# Altium PCB PLL_PCB.PcbDoc (part 2 of 3)
Units mil, origin at the board's own origin, x right, y up, seen from the top; angles counter-clockwise.
Board outline 8251 x 7030 mil, 4 copper layers (Top Layer, Mid-Layer 1, Mid-Layer 2, Bottom Layer); 235 components, 120 nets, 656 pads, 49 vias.
Unrouted connection lines stored in the file: 215.
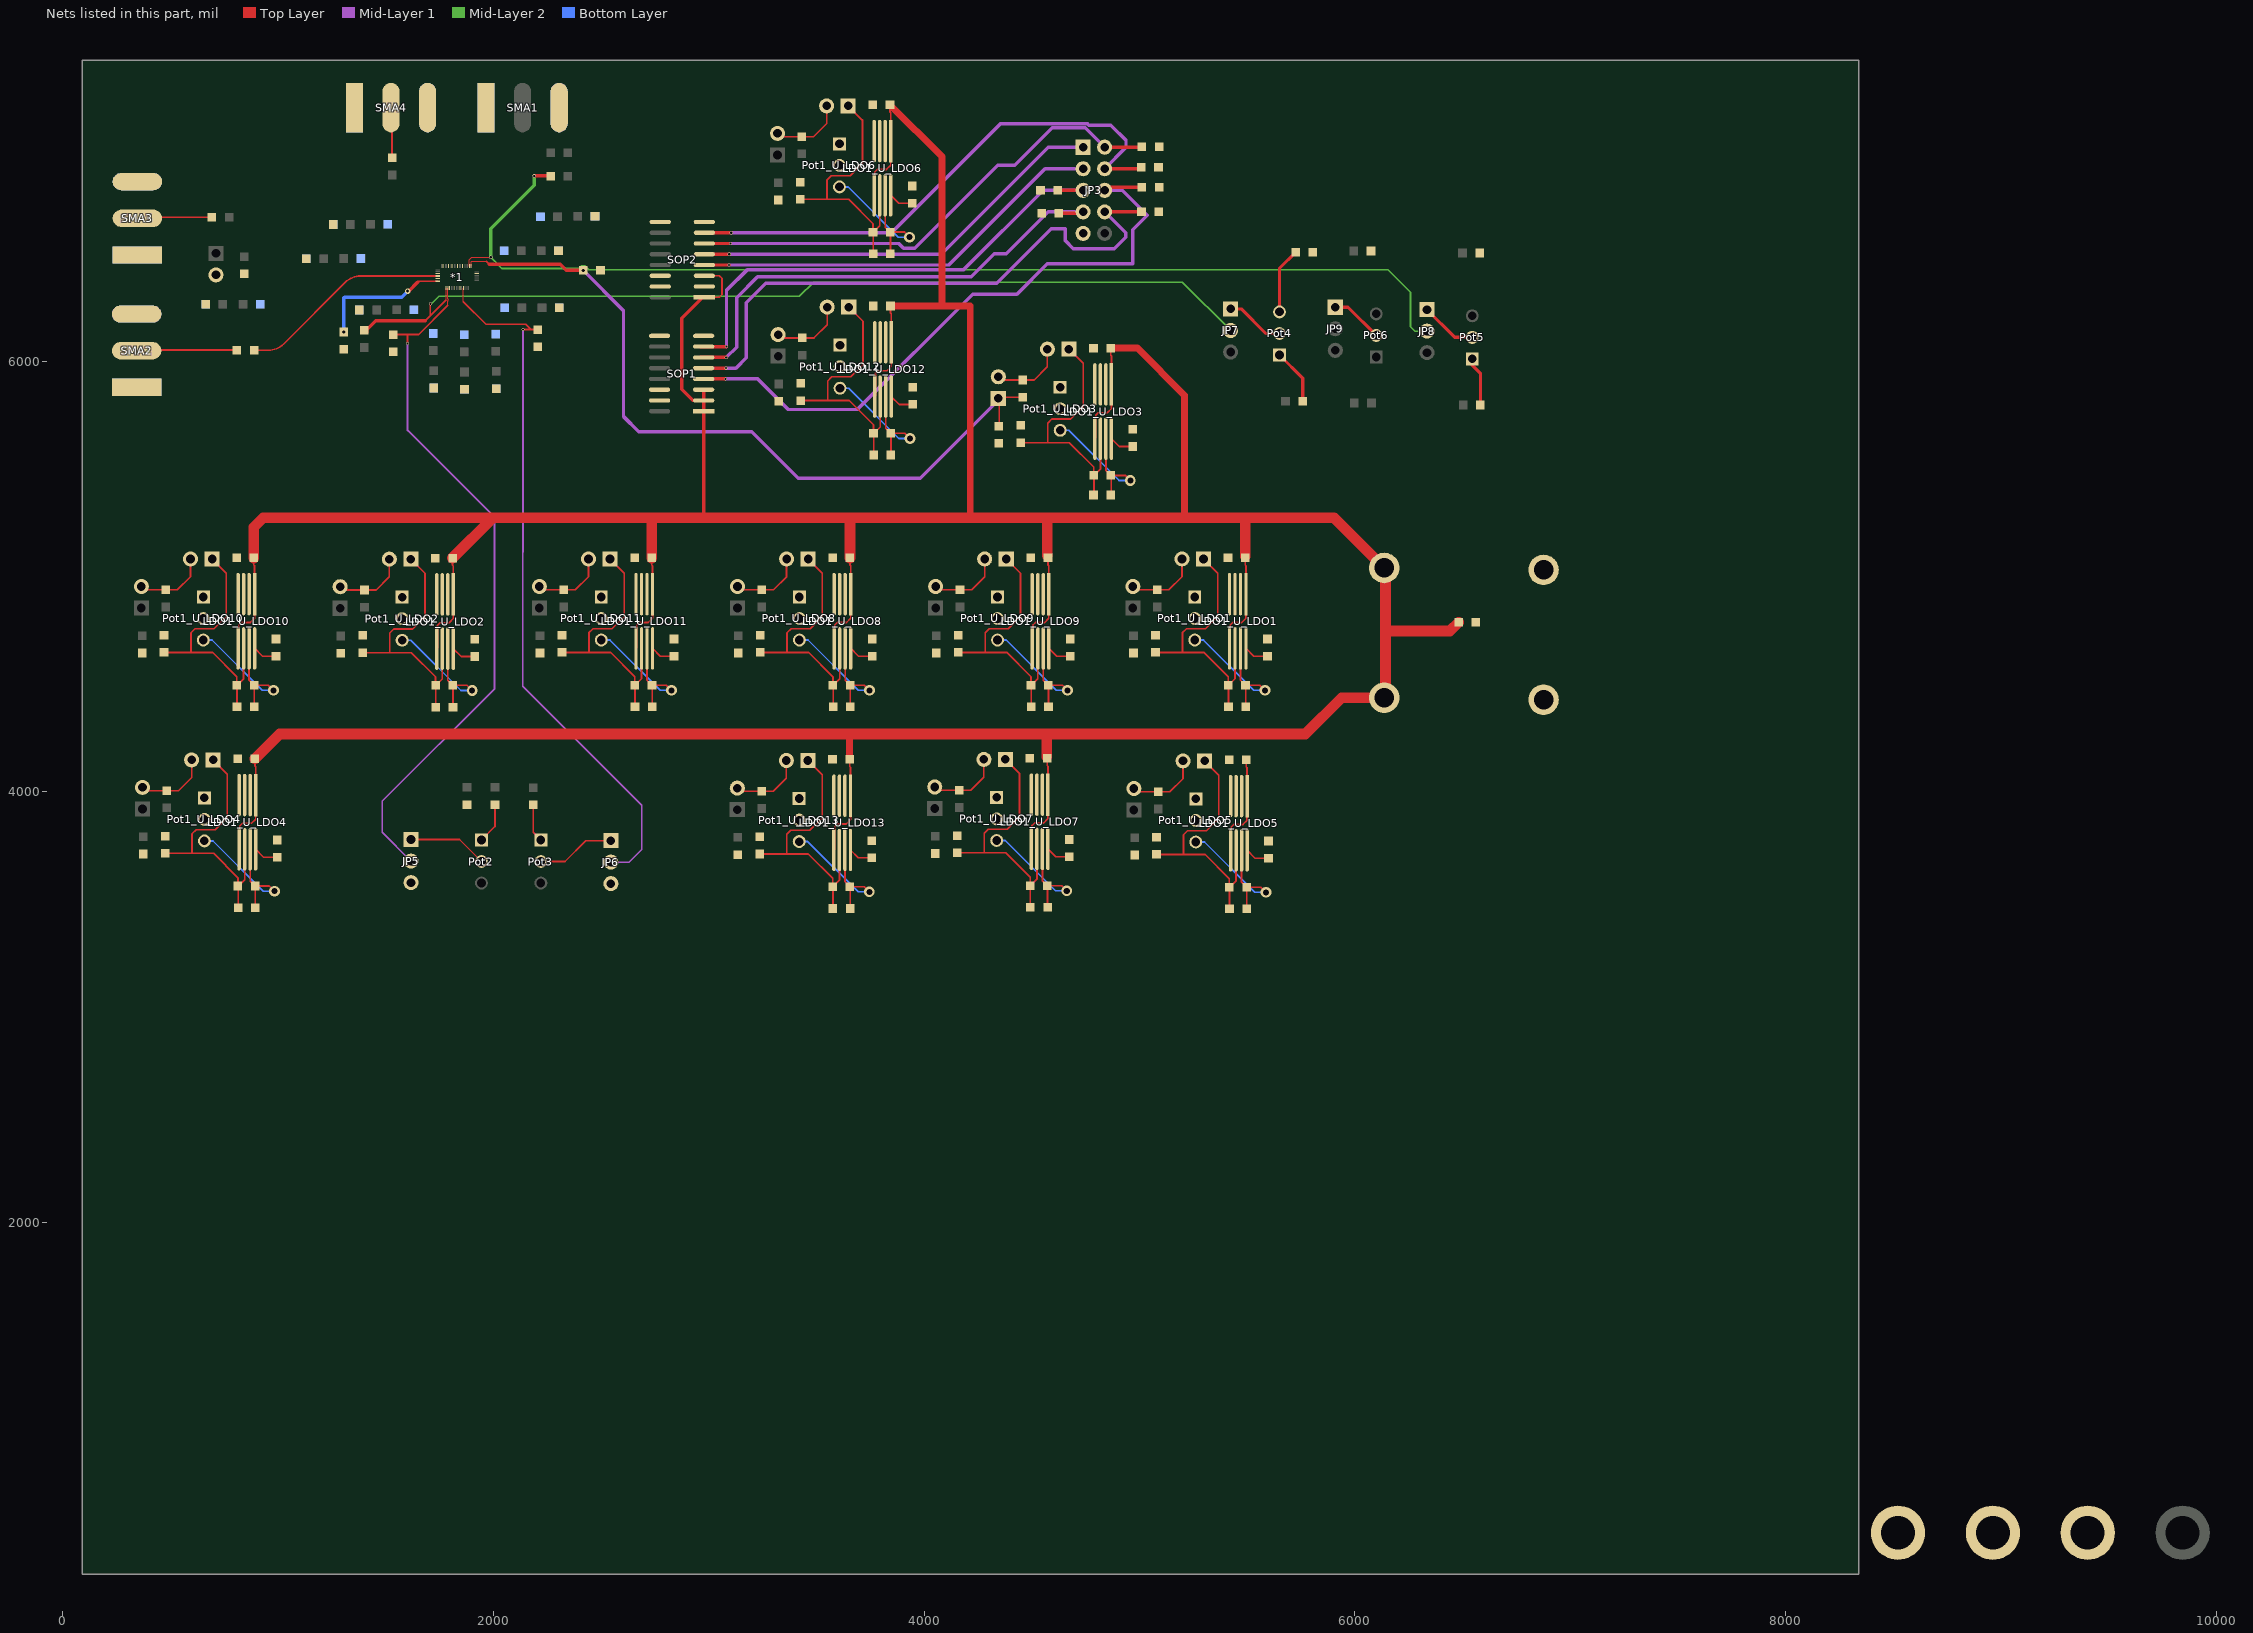
[diagram p4: the nets of this part, all layers, seen from the top]

## Components (designator, comment, footprint, x,y, rotation, side; value= is the part's Value field where it differs from the comment) (continued)
R9 "30k" Resistor 2007,3981 r270 top
R10 "30k" Resistor 2184,3980 r270 top
R11 "1k" Resistor 5718,5815 r0 top
R12 "1k" Resistor 6543,5797 r0 top
R13 "1k" Resistor 6037,5806 r0 top
R14 "1k" Resistor 5765,6507 r0 top
R15 "1k" Resistor 6540,6503 r0 top
R16 "1k" Resistor 6035,6512 r0 top
R17_U_SUPPLY_DECAP_NW1 "2ohm" Resistor 1345,6477 r0 top (schematic designator R17)
R17_U_SUPPLY_DECAP_NW2 "2ohm" Resistor 1469,6636 r0 top (schematic designator R17)
R17_U_SUPPLY_DECAP_NW3 "2ohm" Resistor 2257,6672 r180 top (schematic designator R17)
R17_U_SUPPLY_DECAP_NW4 "2ohm" Resistor 2088,6513 r180 top (schematic designator R17)
R17_U_SUPPLY_DECAP_NW5 "2ohm" Resistor 2091,6248 r180 top (schematic designator R17)
R17_U_SUPPLY_DECAP_NW6 "2ohm" Resistor 2011,6087 r90 top (schematic designator R17)
R17_U_SUPPLY_DECAP_NW7 "2ohm" Resistor 1864,6084 r90 top (schematic designator R17)
R17_U_SUPPLY_DECAP_NW8 "2ohm" Resistor 1721,6090 r90 top (schematic designator R17)
R17_U_SUPPLY_DECAP_NW9 "2ohm" Resistor 1591,6239 r0 top (schematic designator R17)
R17_U_SUPPLY_DECAP_NW10 "2ohm" Resistor 877,6265 r0 top (schematic designator R17)
SMA1 "SMA_EL" SMA_EL 1965,7178 r0 top
SMA2 "SMA_EL" SMA_EL 343,5879 r90 top
SMA3 "SMA_EL" SMA_EL 346,6494 r90 top
SMA4 "SMA_EL" SMA_EL 1354,7178 r0 top
SOP1 "74AVC4T245" 74AVC4T245 2976,5768 r180 top
SOP2 "74AVC4T245" 74AVC4T245 2979,6297 r180 top

## Footprints (in the part's own frame and the unit in brackets; to place one, negate y for a bottom-side part, rotate by r counter-clockwise, add the part's x,y. Pads: shape width x height; smd on the part's side, far side on the other; paste and mask are expansions set on the pad)
74AVC4T245 [mm]
  rect 2.5x0.5 smd: 1(0,0)
  oval 2.5x0.5 smd: 2(0,-1.27) 3(0,-2.54) 4(0,-3.81) 5(0,-5.08) 6(0,-6.35) 7(0,-7.62) 8(0,-8.89) 9(5.2,-8.89) 10(5.2,-7.62) 11(5.2,-6.35) 12(5.2,-5.08) 13(5.2,-3.81) 14(5.2,-2.54) 15(5.2,-1.27) 16(5.2,0)
  silkscreen extent -1.8,-9.53 6.95,0.64
BANANA_CONN [mm]
  round 3.6 hole 2.3: 1(0,0) 2(15.3,0)
  silkscreen extent -3.18,-6 18.41,6
Capacitor [mil]
  rect 40x40 smd: 0(40,0) 1(-40,0)
  silkscreen extent -76,-36 76,36
JUMPER2 [mil]
  rect 70x70 hole 40: 1(0,0)
  round 70 hole 40: 2(0,-100)
  silkscreen extent -50,-150 50,50
JUMPER3 [mil]
  rect 70x70 hole 40: 1(0,0)
  round 70 hole 40: 2(0,-100) 3(0,-200)
  silkscreen extent -50,-250 50,50
JUMPER10 [mil]
  rect 70x70 hole 40: 1(0,0)
  round 70 hole 40: 2(0,-100) 3(0,-200) 4(0,-300) 5(0,-400) 6(100,-400) 7(100,-300) 8(100,-200) 9(100,-100) 10(100,0)
  silkscreen extent -50,-450 150,50
LT3060 [mm]
  rect 5x0.4 smd: 1(0,0)
  oval 5x0.4 smd: 2(0,-0.65) 3(0,-1.3) 4(0,-1.95) 5(6.4,-1.95) 6(6.4,-1.3) 7(6.4,-0.65) 8(6.4,0)
  silkscreen extent -2.85,-2.54 9.27,0.71
PCBComponent_1 [mil]
  rect 20x4 smd mask+0: 1(21,103) 2(21,95) 3(21,87) 5(21,63) 7(21,39) 22(202,46) 23(202,54) 24(202,62) 25(202,70) 26(202,78) 27(202,86) 28(202,94)
  rect 20x8 smd mask+0: 4(21,75) 6(21,51)
  rect 4x20 smd mask+0: 8(60,19) 9(68,19) 10(76,19) 11(84,19) 12(92,19) 13(100,19) 14(108,19) 15(116,19) 16(124,19) 17(132,19) 18(140,19) 19(148,19) 20(156,19) 21(164,19) 29(176,121) 30(168,121) 31(160,121) 32(152,121) 33(144,121) 34(136,121) 36(112,121) 38(88,121) 39(79,121) 40(71,121) 42(46,121) 43(38,121)
  rect 8x20 smd mask+0: 35(124,121) 37(100,121) 41(59,121)
  Top Layer region: 31,61 38,61 38,65 31,65
  Top Layer region: 37,36 184,36 184,104 37,104
  silkscreen extent 63,64 143,102
Pillar_hole [mm]
  round 6.4 hole 4: 1(0,0)
Pot [mil]
  rect 59.88x59.88 / inner rect 67.76x67.76 / far side rect 59.88x59.88 hole 39.88: 1(0,0)
  round 59.88 / inner round 67.76 / far side round 59.88 hole 39.88: 2(100,0)
  round 59.88 / inner round 67.87 / far side round 59.88 hole 39.88: 3(200,0)
  silkscreen extent -93,-105 292,100
Resistor [mil]
  rect 40x40 smd: 0(40,0) 1(-40,0)
  silkscreen extent -76,-36 76,36
SMA_EL [mil]
  rect 80x230 smd: 1(0,0)
  rect 80x230 smd far side: 2(0,0)
  oval 80x230 smd: 3(340,0) 5(170,0)
  oval 80x230 smd far side: 4(340,0)
  silkscreen extent -116,-148 461,152

## Part data
C1_U_LDO1 C1_U_LDO2 C1_U_LDO3 C1_U_LDO4 C1_U_LDO5 C1_U_LDO6 C1_U_LDO7 C1_U_LDO8 C1_U_LDO9 C1_U_LDO10 C1_U_LDO11 C1_U_LDO12 C1_U_LDO13 C2_U_LDO1 C2_U_LDO2 C2_U_LDO3 C2_U_LDO4 C2_U_LDO5 C2_U_LDO6 C2_U_LDO7 C2_U_LDO8 C2_U_LDO9 C2_U_LDO10 C2_U_LDO11 C2_U_LDO12 C2_U_LDO13 C3_U_LDO1 C3_U_LDO2 C3_U_LDO3 C3_U_LDO4 C3_U_LDO5 C3_U_LDO6 C3_U_LDO7 C3_U_LDO8 C3_U_LDO9 C3_U_LDO10 C3_U_LDO11 C3_U_LDO12 C3_U_LDO13 C4_U_LDO1 C4_U_LDO2 C4_U_LDO3 C4_U_LDO4 C4_U_LDO5 C4_U_LDO6 C4_U_LDO7 C4_U_LDO8 C4_U_LDO9 C4_U_LDO10 C4_U_LDO11 C4_U_LDO12 C4_U_LDO13 C5_U_LDO1 C5_U_LDO2 C5_U_LDO3 C5_U_LDO4 C5_U_LDO5 C5_U_LDO6 C5_U_LDO7 C5_U_LDO8 C5_U_LDO9 C5_U_LDO10 C5_U_LDO11 C5_U_LDO12 C5_U_LDO13 C11 C12 C13 C14 C16 C17 C18: library part cap, "0603cap"
C6 C7 C8 C9 C10 C15 C19_U_SUPPLY_DECAP_NW1 C19_U_SUPPLY_DECAP_NW2 C19_U_SUPPLY_DECAP_NW3 C19_U_SUPPLY_DECAP_NW4 C19_U_SUPPLY_DECAP_NW5 C19_U_SUPPLY_DECAP_NW6 C19_U_SUPPLY_DECAP_NW7 C19_U_SUPPLY_DECAP_NW8 C19_U_SUPPLY_DECAP_NW9 C19_U_SUPPLY_DECAP_NW10 C20_U_SUPPLY_DECAP_NW1 C20_U_SUPPLY_DECAP_NW2 C20_U_SUPPLY_DECAP_NW3 C20_U_SUPPLY_DECAP_NW4 C20_U_SUPPLY_DECAP_NW5 C20_U_SUPPLY_DECAP_NW6 C20_U_SUPPLY_DECAP_NW7 C20_U_SUPPLY_DECAP_NW8 C20_U_SUPPLY_DECAP_NW9 C20_U_SUPPLY_DECAP_NW10 C21_U_SUPPLY_DECAP_NW1 C21_U_SUPPLY_DECAP_NW2 C21_U_SUPPLY_DECAP_NW3 C21_U_SUPPLY_DECAP_NW4 C21_U_SUPPLY_DECAP_NW5 C21_U_SUPPLY_DECAP_NW6 C21_U_SUPPLY_DECAP_NW7 C21_U_SUPPLY_DECAP_NW8 C21_U_SUPPLY_DECAP_NW9 C21_U_SUPPLY_DECAP_NW10: "0603cap"
JP1_U_LDO1 JP1_U_LDO2 JP1_U_LDO3 JP1_U_LDO4 JP1_U_LDO5 JP1_U_LDO6 JP1_U_LDO7 JP1_U_LDO8 JP1_U_LDO9 JP1_U_LDO10 JP1_U_LDO11 JP1_U_LDO12 JP1_U_LDO13 JP2_U_LDO1 JP2_U_LDO2 JP2_U_LDO3 JP2_U_LDO4 JP2_U_LDO5 JP2_U_LDO6 JP2_U_LDO7 JP2_U_LDO8 JP2_U_LDO9 JP2_U_LDO10 JP2_U_LDO11 JP2_U_LDO12 JP2_U_LDO13 JP4: library part Jumper_2, "Jumper_2"
JP3: library part Jumper_10, "Jumper_10p"
JP5 JP6 JP7 JP8 JP9: library part Jumper_3, "Jumper_3p"
LDO1_U_LDO1 LDO1_U_LDO2 LDO1_U_LDO3 LDO1_U_LDO4 LDO1_U_LDO5 LDO1_U_LDO6 LDO1_U_LDO7 LDO1_U_LDO8 LDO1_U_LDO9 LDO1_U_LDO10 LDO1_U_LDO11 LDO1_U_LDO12 LDO1_U_LDO13: library part LT3060, "LT3060 LDO"
Pillar5 Pillar6 Pillar7 Pillar8: library part Pillar_hole
Pot1_U_LDO1 Pot1_U_LDO2 Pot1_U_LDO3 Pot1_U_LDO4 Pot1_U_LDO5 Pot1_U_LDO6 Pot1_U_LDO7 Pot1_U_LDO8 Pot1_U_LDO9 Pot1_U_LDO10 Pot1_U_LDO11 Pot1_U_LDO12 Pot1_U_LDO13 Pot2 Pot3 Pot4 Pot5 Pot6: library part Pot, "Variable Resistor"
R1_U_LDO1 R1_U_LDO2 R1_U_LDO3 R1_U_LDO4 R1_U_LDO5 R1_U_LDO6 R1_U_LDO7 R1_U_LDO8 R1_U_LDO9 R1_U_LDO10 R1_U_LDO11 R1_U_LDO12 R1_U_LDO13 R2_U_LDO1 R2_U_LDO2 R2_U_LDO3 R2_U_LDO4 R2_U_LDO5 R2_U_LDO6 R2_U_LDO7 R2_U_LDO8 R2_U_LDO9 R2_U_LDO10 R2_U_LDO11 R2_U_LDO12 R2_U_LDO13 R3 R4 R5 R6 R7 R8 R9 R10 R11 R12 R13 R14 R15 R16 R17_U_SUPPLY_DECAP_NW1 R17_U_SUPPLY_DECAP_NW2 R17_U_SUPPLY_DECAP_NW3 R17_U_SUPPLY_DECAP_NW4 R17_U_SUPPLY_DECAP_NW5 R17_U_SUPPLY_DECAP_NW6 R17_U_SUPPLY_DECAP_NW7 R17_U_SUPPLY_DECAP_NW8 R17_U_SUPPLY_DECAP_NW9 R17_U_SUPPLY_DECAP_NW10: library part res, "0603Res"
SOP1 SOP2: "74AVC4T245 Voltage Shifter"

## Via types
v1: diameter 15, hole 10, Top Layer to Bottom Layer, 17 vias
v2: diameter 50, hole 28, Top Layer to Bottom Layer, 16 vias
v3: diameter 20, hole 15, Top Layer to Bottom Layer, 11 vias
v4: diameter 25, hole 15, Top Layer to Bottom Layer, 5 vias

## Nets (pads, with @x,y where several pads share a name; then routed paths per layer and width w, separated by ;. In a path a pad name is that pad's centre, name@x,y a point inside that pad or via, vN(x,y) a via of type N, cw(c..) or ccw(c..) an arc to the next point about the centre after c; other vN are vias at no path point)
AC_COUPLED_GND: *1.6 C15.0 | length 638.9
  Top Layer w4: v4(1601,6326) v4@1607,6326
  Top Layer w8: 1648,6366 1654,6372 *1.6@1741,6372
  Top Layer w16: v4@1607,6326 1647,6366 1648,6366
  Mid-Layer 1 w4: v4@1601,6314 v4(1601,6326)
  Bottom Layer w16: v4(1305,6136) 1305,6295 1308,6298 1573,6298 v4(1601,6326)
DLL_EXT_VCTRL: *1.8 C16.0 JP7.2 | length 4402.7
  Top Layer w4: C16.0@1418,6132 C16.0@1418,6153 ; 1780,6285 *1.8@1780,6340
  Top Layer w6: v1(1707,6267) 1707,6212 1780,6285
  Top Layer w8: 1683,6188 1707,6212
  Top Layer w16: C16.0@1418,6153 1453,6188 1683,6188
  Mid-Layer 1 w6: v1(1707,6267) v1@1707,6271
  Mid-Layer 2 w6: v1(1707,6267) v1@1712,6267 ; 3420,6302 3486,6368 5198,6368 JP7.2@5423,6143
  Mid-Layer 2 w8: v1@1712,6267 1747,6302 3420,6302
ESD_VDD: *1.29 C2_U_LDO3.1 C8.1 JP2_U_LDO3.1 R1_U_LDO3.1 | length 3574.1
  Top Layer w4: *1.29@1896,6442 1896,6462 1899,6465 1909.27,6465 1910.27,6464 1966,6464
  Top Layer w8: 1966,6464 1980,6450 ; C2_U_LDO3.1@4347,5699 4349,5701 4349,5833 R1_U_LDO3.1@4457,5833
  Top Layer w16: 1980,6450 2309,6450 2337,6422 v4(2417,6422)
  Mid-Layer 1 w16: v4(2417,6422) 2603.5,6235.5 2603.5,5743.5 2674,5673 3199,5673 3415,5457 3982,5457 JP2_U_LDO3.1@4348.5,5823.5
FLL_EXT_VCTRL: *1.30 C17.0 JP8.2 | length 5263.6
  Top Layer w4: *1.30@1888,6442 1888,6472 1899,6483 v1(1987,6483)
  Top Layer w16: v1(2189,6861) C17.0@2264,6861
  Mid-Layer 2 w8: v1(1987,6483) 2039,6431 2396.5,6431 2408,6442.5 2425.49,6442.5 2442.99,6425 6154,6425 6258,6321 6258,6161 6279,6140 JP8.2@6335,6140
  Mid-Layer 2 w16: v1(1987,6483) 1987,6616 2189,6818 v1(2189,6861)
GND: *1.3 *1.5 *1.10 *1.13 *1.16 *1.27 *1.34 *1.36 *1.38 *1.40 *1.42 BANANA1.1 BANANA1.2 C1_U_LDO1.0 C1_U_LDO2.0 C1_U_LDO3.0 C1_U_LDO4.0 C1_U_LDO5.0 C1_U_LDO6.0 C1_U_LDO7.0 C1_U_LDO8.0 C1_U_LDO9.0 C1_U_LDO10.0 C1_U_LDO11.0 C1_U_LDO12.0 C1_U_LDO13.0 C2_U_LDO1.0 C2_U_LDO2.0 C2_U_LDO3.0 C2_U_LDO4.0 C2_U_LDO5.0 C2_U_LDO6.0 C2_U_LDO7.0 C2_U_LDO8.0 C2_U_LDO9.0 C2_U_LDO10.0 C2_U_LDO11.0 C2_U_LDO12.0 C2_U_LDO13.0 C4_U_LDO1.0 C4_U_LDO2.0 C4_U_LDO3.0 C4_U_LDO4.0 C4_U_LDO5.0 C4_U_LDO6.0 C4_U_LDO7.0 C4_U_LDO8.0 C4_U_LDO9.0 C4_U_LDO10.0 C4_U_LDO11.0 C4_U_LDO12.0 C4_U_LDO13.0 C5_U_LDO1.1 C5_U_LDO2.1 C5_U_LDO3.1 C5_U_LDO4.1 C5_U_LDO5.1 C5_U_LDO6.1 C5_U_LDO7.1 C5_U_LDO8.1 C5_U_LDO9.1 C5_U_LDO10.1 C5_U_LDO11.1 C5_U_LDO12.1 C5_U_LDO13.1 C6.1 C8.0 C11.1 C12.1 C13.1 C14.1 C15.1 C19_U_SUPPLY_DECAP_NW1.0 C19_U_SUPPLY_DECAP_NW2.0 C19_U_SUPPLY_DECAP_NW3.0 C19_U_SUPPLY_DECAP_NW4.0 C19_U_SUPPLY_DECAP_NW5.0 C19_U_SUPPLY_DECAP_NW6.0 C19_U_SUPPLY_DECAP_NW7.0 C19_U_SUPPLY_DECAP_NW8.0 C19_U_SUPPLY_DECAP_NW9.0 C19_U_SUPPLY_DECAP_NW10.0 C20_U_SUPPLY_DECAP_NW1.0 C20_U_SUPPLY_DECAP_NW2.0 C20_U_SUPPLY_DECAP_NW3.0 C20_U_SUPPLY_DECAP_NW4.0 C20_U_SUPPLY_DECAP_NW5.0 C20_U_SUPPLY_DECAP_NW6.0 C20_U_SUPPLY_DECAP_NW7.0 C20_U_SUPPLY_DECAP_NW8.0 C20_U_SUPPLY_DECAP_NW9.0 C20_U_SUPPLY_DECAP_NW10.0 C21_U_SUPPLY_DECAP_NW1.0 C21_U_SUPPLY_DECAP_NW2.0 C21_U_SUPPLY_DECAP_NW3.0 C21_U_SUPPLY_DECAP_NW4.0 C21_U_SUPPLY_DECAP_NW5.0 C21_U_SUPPLY_DECAP_NW6.0 C21_U_SUPPLY_DECAP_NW7.0 C21_U_SUPPLY_DECAP_NW8.0 C21_U_SUPPLY_DECAP_NW9.0 C21_U_SUPPLY_DECAP_NW10.0 JP3.5 JP4.2 JP5.3 JP6.3 LDO1_U_LDO1.2 LDO1_U_LDO1.3 LDO1_U_LDO1.4 LDO1_U_LDO2.2 LDO1_U_LDO2.3 LDO1_U_LDO2.4 LDO1_U_LDO3.2 LDO1_U_LDO3.3 LDO1_U_LDO3.4 LDO1_U_LDO4.2 LDO1_U_LDO4.3 LDO1_U_LDO4.4 LDO1_U_LDO5.2 LDO1_U_LDO5.3 LDO1_U_LDO5.4 LDO1_U_LDO6.2 LDO1_U_LDO6.3 LDO1_U_LDO6.4 LDO1_U_LDO7.2 LDO1_U_LDO7.3 LDO1_U_LDO7.4 LDO1_U_LDO8.2 LDO1_U_LDO8.3 LDO1_U_LDO8.4 LDO1_U_LDO9.2 LDO1_U_LDO9.3 LDO1_U_LDO9.4 LDO1_U_LDO10.2 LDO1_U_LDO10.3 LDO1_U_LDO10.4 LDO1_U_LDO11.2 LDO1_U_LDO11.3 LDO1_U_LDO11.4 LDO1_U_LDO12.2 LDO1_U_LDO12.3 LDO1_U_LDO12.4 LDO1_U_LDO13.2 LDO1_U_LDO13.3 LDO1_U_LDO13.4 Pillar6.1 Pillar7.1 Pillar8.1 Pot1_U_LDO1.1 Pot1_U_LDO1.2 Pot1_U_LDO2.1 Pot1_U_LDO2.2 Pot1_U_LDO3.1 Pot1_U_LDO3.2 Pot1_U_LDO4.1 Pot1_U_LDO4.2 Pot1_U_LDO5.1 Pot1_U_LDO5.2 Pot1_U_LDO6.1 Pot1_U_LDO6.2 Pot1_U_LDO7.1 Pot1_U_LDO7.2 Pot1_U_LDO8.1 Pot1_U_LDO8.2 Pot1_U_LDO9.1 Pot1_U_LDO9.2 Pot1_U_LDO10.1 Pot1_U_LDO10.2 Pot1_U_LDO11.1 Pot1_U_LDO11.2 Pot1_U_LDO12.1 Pot1_U_LDO12.2 Pot1_U_LDO13.1 Pot1_U_LDO13.2 R3.1 R4.1 R5.1 R6.1 R7.1 R8.1 R14.0 R15.0 R16.0 SMA1.1 SMA1.2 SMA1.3 SMA1.4 SMA2.1 SMA2.2 SMA2.3 SMA2.4 SMA3.1 SMA3.2 SMA3.3 SMA3.4 SMA4.1 SMA4.2 SMA4.3 SMA4.4 SOP1.8 SOP1.9 SOP1.14 SOP1.15 SOP2.2 SOP2.8 SOP2.9 SOP2.14 SOP2.15 | length 4.2
  Top Layer w4: BANANA1.2@6873,4431.64 BANANA1.2@6876,4428.64
IBIAS25U_DAC_DLL: *1.9 C11.0 JP5.2 | length 3274.2
  Top Layer w4: 1788,6260 1788,6280.27 1789,6281.27 1789,6288.73 1788,6289.73 *1.9@1788,6340
  Top Layer w8: C11.0@1535,6124 1601,6124 ; v1(1601,6082) 1601,6124 ; 1788,6260 1652,6124 1601,6124
  Mid-Layer 1 w8: v1(1601,6082) 1601,5679 2005,5275 2005,4480 1483,3958 1483,3813 JP5.2@1617,3679
IBIAS25U_DAC_PLL: *1.18 C12.0 JP6.2 | length 3311.3
  Top Layer w4: 1860,6277 *1.18@1860,6340
  Top Layer w8: 1860,6277 1965,6172 2150,6172 2175,6147 ; v1(2137,6147) 2175,6147 ; C12.0@2206,6147 2175,6147
  Mid-Layer 1 w8: v1(2137,6147) 2137,5114 2136,5113 2136,4490 2688,3938 2688,3733 2629,3674 JP6.2@2545,3674
IN_U_LDO1: BANANA2.1 BANANA2.2 C5_U_LDO1.0 C5_U_LDO2.0 C5_U_LDO3.0 C5_U_LDO4.0 C5_U_LDO5.0 C5_U_LDO6.0 C5_U_LDO7.0 C5_U_LDO8.0 C5_U_LDO9.0 C5_U_LDO10.0 C5_U_LDO11.0 C5_U_LDO12.0 C5_U_LDO13.0 C13.0 LDO1_U_LDO1.1 LDO1_U_LDO1.5 LDO1_U_LDO2.1 LDO1_U_LDO2.5 LDO1_U_LDO3.1 LDO1_U_LDO3.5 LDO1_U_LDO4.1 LDO1_U_LDO4.5 LDO1_U_LDO5.1 LDO1_U_LDO5.5 LDO1_U_LDO6.1 LDO1_U_LDO6.5 LDO1_U_LDO7.1 LDO1_U_LDO7.5 LDO1_U_LDO8.1 LDO1_U_LDO8.5 LDO1_U_LDO9.1 LDO1_U_LDO9.5 LDO1_U_LDO10.1 LDO1_U_LDO10.5 LDO1_U_LDO11.1 LDO1_U_LDO11.5 LDO1_U_LDO12.1 LDO1_U_LDO12.5 LDO1_U_LDO13.1 LDO1_U_LDO13.5 SOP1.1 SOP1.2 SOP1.3 SOP2.1 SOP2.3 | length 24110.8
  Top Layer w8: LDO1_U_LDO10.5@813.73,4666.53 817,4669.8 817,4775 829,4787 871,4787 890.5,4806.5 LDO1_U_LDO10.1@890.5,4918.5 890.5,5050.5 887,5054 C5_U_LDO10.0@887,5087 ; LDO1_U_LDO4.5@818.73,3733.53 822,3736.8 822,3842 834,3854 876,3854 895.5,3873.5 LDO1_U_LDO4.1@895.5,3985.5 895.5,4117.5 892,4121 C5_U_LDO4.0@892,4154 ; LDO1_U_LDO2.5@1736.73,4665.53 1740,4668.8 1740,4774 1752,4786 1794,4786 1813.5,4805.5 LDO1_U_LDO2.1@1813.5,4917.5 1813.5,5049.5 1810,5053 C5_U_LDO2.0@1810,5086 ; LDO1_U_LDO11.5@2661.73,4666.53 2665,4669.8 2665,4775 2677,4787 2719,4787 2738.5,4806.5 LDO1_U_LDO11.1@2738.5,4918.5 2738.5,5050.5 2735,5054 C5_U_LDO11.0@2735,5087 ; 2926,5818 SOP1.2@2976,5818 ; SOP2.1@2971,6297 SOP2.1@2979,6297 3048,6297 3061,6310 3061,6385 3049,6397 SOP2.3@2979,6397 ; LDO1_U_LDO13.5@3580.73,3730.53 3584,3733.8 3584,3839 3596,3851 3638,3851 3657.5,3870.5 LDO1_U_LDO13.1@3657.5,3982.5 3657.5,4114.5 3654,4118 C5_U_LDO13.0@3654,4151 ; LDO1_U_LDO8.5@3581.73,4666.53 3585,4669.8 3585,4775 3597,4787 3639,4787 3658.5,4806.5 LDO1_U_LDO8.1@3658.5,4918.5 3658.5,5050.5 3655,5054 C5_U_LDO8.0@3655,5087 ; LDO1_U_LDO6.5@3767.73,6770.53 3771,6773.8 3771,6879 3783,6891 3825,6891 3844.5,6910.5 LDO1_U_LDO6.1@3844.5,7022.5 3844.5,7154.5 3841,7158 C5_U_LDO6.0@3841,7191 ; LDO1_U_LDO12.5@3770.23,5836.03 3773.5,5839.3 3773.5,5944.5 3785.5,5956.5 3827.5,5956.5 3847,5976 LDO1_U_LDO12.1@3847,6088 3847,6220 3843.5,6223.5 C5_U_LDO12.0@3843.5,6256.5 ; LDO1_U_LDO7.5@4497.73,3735.53 4501,3738.8 4501,3844 4513,3856 4555,3856 4574.5,3875.5 LDO1_U_LDO7.1@4574.5,3987.5 4574.5,4119.5 4571,4123 C5_U_LDO7.0@4571,4156 4571,4258 ; LDO1_U_LDO9.5@4501.73,4666.53 4505,4669.8 4505,4775 4517,4787 4559,4787 4578.5,4806.5 LDO1_U_LDO9.1@4578.5,4918.5 4578.5,5050.5 4575,5054 C5_U_LDO9.0@4575,5087 ; LDO1_U_LDO3.5@4792.73,5640.53 4796,5643.8 4796,5749 4808,5761 4850,5761 4869.5,5780.5 LDO1_U_LDO3.1@4869.5,5892.5 4869.5,6024.5 4866,6028 C5_U_LDO3.0@4866,6061 ; LDO1_U_LDO1.5@5417.73,4666.53 5421,4669.8 5421,4775 5433,4787 5475,4787 5494.5,4806.5 LDO1_U_LDO1.1@5494.5,4918.5 5494.5,5050.5 5491,5054 C5_U_LDO1.0@5491,5087 ; LDO1_U_LDO5.5@5422.73,3728.53 5426,3731.8 5426,3837 5438,3849 5480,3849 5499.5,3868.5 LDO1_U_LDO5.1@5499.5,3980.5 5499.5,4112.5 5496,4116 C5_U_LDO5.0@5496,4149 ; BANANA2.2@6136,4437.64 BANANA2.2@6142,4443.64
  Top Layer w16: 2926,5818 2874,5870 2874,6200 SOP2.1@2971,6297 ; 2976,5279 SOP1.1@2976,5768 SOP1.2@2976,5818 SOP1.3@2976,5868
  Top Layer w32: C5_U_LDO13.0@3654,4151 3654,4268 ; C5_U_LDO6.0@3841,7191 4082,6950 4082,6257.5 ; C5_U_LDO12.0@3843.5,6256.5 4214,6256.5 4214,5290 ; C5_U_LDO3.0@4866,6061 4990,6061 5209,5842 5209,5273
  Top Layer w50: C5_U_LDO10.0@887,5087 887,5229 931,5273 1997,5273 ; C5_U_LDO4.0@892,4154 1007,4269 5770,4269 5938.64,4437.64 BANANA2.2@6136,4437.64 ; C5_U_LDO2.0@1810,5086 1997,5273 ; C5_U_LDO11.0@2735,5087 2735,5248 ; C5_U_LDO8.0@3655,5087 3655,5261 ; C5_U_LDO7.0@4569,4163 4569,4259 ; C5_U_LDO9.0@4571,5098 4571,5272 ; C5_U_LDO1.0@5491,5094 5491,5268 ; BANANA2.1@6136,5040 5903,5273 5209,5273 1997,5273 ; BANANA2.2@6142,4443.64 6142,4747 6441,4747 C13.0@6482,4788 ; 6142,4750 BANANA2.1@6142,5034
INCLK: *1.4 C7.0 | length 982.3
  Top Layer w8: C7.0@893,6051 954.58,6051 ccw(c954.58,6151) 1025.29,6080.29 1311.71,6366.71 cw(c1382.42,6296) 1382.42,6396 *1.4@1741,6396
MC_RESETB: JP3.10 R3.0 SOP2.6 | length 2306.9
  Top Layer w15: JP3.10@4838,6994 R3.0@5008,6994
  Top Layer w16: SOP2.6@2979,6547 v1(3100,6547)
  Mid-Layer 1 w16: v1(3100,6547) 3882,6547 3904,6525 3956,6525 4342,6911 4421,6911 4594,7084 4748,7084 JP3.10@4838,6994
MC_SCAN_CLK: JP3.3 R5.0 SOP1.7 | length 2348.6
  Top Layer w16: SOP1.7@2961,6068 SOP1.7@2976,6068 v1(3082,6068) ; R5.0@4620,6794 JP3.3@4738,6794
  Mid-Layer 1 w16: v1(3082,6068) 3082,6329 3177,6424 4182,6424 4552,6794 JP3.3@4738,6794
MC_SCAN_CLK2: JP3.4 R7.0 SOP1.6 | length 2298.2
  Top Layer w15: R7.0@4625,6687 JP3.4@4731,6687
  Top Layer w16: SOP1.6@2960,6018 SOP1.6@2976,6018 v1(3081,6018)
  Mid-Layer 1 w16: v1(3081,6018) 3129,6066 3129,6295 3226,6392 4218,6392 4325,6499 4381,6499 4576,6694 JP3.4@4738,6694
MC_SCAN_EN: JP3.7 R8.0 SOP1.5 | length 2818.7
  Top Layer w15: JP3.7@4838,6694 R8.0@5009,6694
  Top Layer w16: SOP1.5@2958,5968 SOP1.5@2976,5968 v1(3079,5968)
  Mid-Layer 1 w16: v1(3079,5968) 3126,5968 3174,6016 3174,6271 3265,6362 4336,6362 4590,6616 4656,6616 4656,6560 4693,6523 4883,6523 4936,6576 4936,6596 JP3.7@4838,6694
MC_SCAN_IN: JP3.8 R6.0 SOP1.4 | length 3008
  Top Layer w15: JP3.8@4852,6808 R6.0@5011,6808
  Top Layer w16: SOP1.4@2956,5918 SOP1.4@2976,5918 v1(3077,5918)
  Mid-Layer 1 w16: v1(3077,5918) 3226,5918 3368,5776 3690,5776 4226,6312 4431,6312 4572,6453 4586,6453 4968,6453 4968,6611 5035,6678 4919,6794 JP3.8@4838,6794
MC_SCAN_LOAD: JP3.9 R4.0 SOP2.7 | length 2536.3
  Top Layer w16: SOP2.7@2979,6597 v1(3104,6597) ; JP3.9@4838,6894 R4.0@5001,6894
  Mid-Layer 1 w16: v1(3104,6597) 3848,6597 4355,7104 4756.28,7104 4764.28,7096 4867,7096 4937,7026 4937,6993 JP3.9@4838,6894
MC_SCAN_OUT: JP3.1 SOP2.5 | length 1969.9
  Top Layer w16: SOP2.5@2974,6497 SOP2.5@2979,6497 v1(3095,6497)
  Mid-Layer 1 w16: v1(3095,6497) 4080,6497 4577,6994 JP3.1@4738,6994
MC_SERIAL_READ_OUT: JP3.2 SOP2.4 | length 1950.2
  Top Layer w16: SOP2.4@2973,6447 SOP2.4@2979,6447 v1(3094,6447)
  Mid-Layer 1 w16: v1(3094,6447) 4114,6447 4561,6894 JP3.2@4738,6894
NetC1_U_LDO1_1: C1_U_LDO1.1 LDO1_U_LDO1.8 | length 114.6
  Top Layer w8: LDO1_U_LDO1.8@5494.5,4666.53 5531.03,4630 C1_U_LDO1.1@5594,4630
NetC1_U_LDO2_1: C1_U_LDO2.1 LDO1_U_LDO2.8 | length 114.6
  Top Layer w8: LDO1_U_LDO2.8@1813.5,4665.53 1850.03,4629 C1_U_LDO2.1@1913,4629
NetC1_U_LDO3_1: C1_U_LDO3.1 LDO1_U_LDO3.8 | length 114.6
  Top Layer w8: LDO1_U_LDO3.8@4869.5,5640.53 4906.03,5604 C1_U_LDO3.1@4969,5604
NetC1_U_LDO4_1: C1_U_LDO4.1 LDO1_U_LDO4.8 | length 114.6
  Top Layer w8: LDO1_U_LDO4.8@895.5,3733.53 932.03,3697 C1_U_LDO4.1@995,3697
NetC1_U_LDO5_1: C1_U_LDO5.1 LDO1_U_LDO5.8 | length 114.6
  Top Layer w8: LDO1_U_LDO5.8@5499.5,3728.53 5536.03,3692 C1_U_LDO5.1@5599,3692
NetC1_U_LDO6_1: C1_U_LDO6.1 LDO1_U_LDO6.8 | length 114.6
  Top Layer w8: LDO1_U_LDO6.8@3844.5,6770.53 3881.03,6734 C1_U_LDO6.1@3944,6734
NetC1_U_LDO7_1: C1_U_LDO7.1 LDO1_U_LDO7.8 | length 114.6
  Top Layer w8: LDO1_U_LDO7.8@4574.5,3735.53 4611.03,3699 C1_U_LDO7.1@4674,3699
NetC1_U_LDO8_1: C1_U_LDO8.1 LDO1_U_LDO8.8 | length 114.6
  Top Layer w8: LDO1_U_LDO8.8@3658.5,4666.53 3695.03,4630 C1_U_LDO8.1@3758,4630
NetC1_U_LDO9_1: C1_U_LDO9.1 LDO1_U_LDO9.8 | length 114.6
  Top Layer w8: LDO1_U_LDO9.8@4578.5,4666.53 4615.03,4630 C1_U_LDO9.1@4678,4630
NetC1_U_LDO10_1: C1_U_LDO10.1 LDO1_U_LDO10.8 | length 114.6
  Top Layer w8: LDO1_U_LDO10.8@890.5,4666.53 927.03,4630 C1_U_LDO10.1@990,4630
NetC1_U_LDO11_1: C1_U_LDO11.1 LDO1_U_LDO11.8 | length 114.6
  Top Layer w8: LDO1_U_LDO11.8@2738.5,4666.53 2775.03,4630 C1_U_LDO11.1@2838,4630
NetC1_U_LDO12_1: C1_U_LDO12.1 LDO1_U_LDO12.8 | length 114.6
  Top Layer w8: LDO1_U_LDO12.8@3847,5836.03 3883.53,5799.5 C1_U_LDO12.1@3946.5,5799.5
NetC1_U_LDO13_1: C1_U_LDO13.1 LDO1_U_LDO13.8 | length 114.6
  Top Layer w8: LDO1_U_LDO13.8@3657.5,3730.53 3694.03,3694 C1_U_LDO13.1@3757,3694
NetC3_U_LDO1_0: C3_U_LDO1.0 LDO1_U_LDO1.7 Pot1_U_LDO1.3 R2_U_LDO1.1 | length 790.7
  Top Layer w8: LDO1_U_LDO1.7@5468.91,4666.53 5468.91,4519.09 C3_U_LDO1.0@5492,4496 ; R2_U_LDO1.1@5493,4408 5493,4495 C3_U_LDO1.0@5492,4496 ; v2(5582,4472) 5558,4496 C3_U_LDO1.0@5492,4496
  Bottom Layer w8: Pot1_U_LDO1.3@5256.5,4705.5 5296.5,4705.5 5530,4472 v2(5582,4472)
NetC3_U_LDO1_1: C3_U_LDO1.1 C4_U_LDO1.1 JP1_U_LDO1.1 LDO1_U_LDO1.6 R2_U_LDO1.0 | length 1289.9
  Top Layer w8: C4_U_LDO1.1@5074,4648 5199,4648 ; JP1_U_LDO1.1@5287,5072 JP1_U_LDO1.1@5297,5082 5363,5016 5363,4815 5306,4758 5218,4758 5199,4739 5199,4648 ; C3_U_LDO1.1@5412,4496 5412,4535 5299,4648 5199,4648 ; R2_U_LDO1.0@5413,4408 5413,4495 5443.32,4525.32 LDO1_U_LDO1.6@5443.32,4666.53
NetC3_U_LDO2_0: C3_U_LDO2.0 LDO1_U_LDO2.7 Pot1_U_LDO2.3 R2_U_LDO2.1 | length 790.7
  Top Layer w8: LDO1_U_LDO2.7@1787.91,4665.53 1787.91,4518.09 C3_U_LDO2.0@1811,4495 ; R2_U_LDO2.1@1812,4407 1812,4494 C3_U_LDO2.0@1811,4495 ; v2(1901,4471) 1877,4495 C3_U_LDO2.0@1811,4495
  Bottom Layer w8: Pot1_U_LDO2.3@1575.5,4704.5 1615.5,4704.5 1849,4471 v2(1901,4471)
NetC3_U_LDO2_1: C3_U_LDO2.1 C4_U_LDO2.1 JP1_U_LDO2.1 LDO1_U_LDO2.6 R2_U_LDO2.0 | length 1289.9
  Top Layer w8: C4_U_LDO2.1@1393,4647 1518,4647 ; JP1_U_LDO2.1@1606,5071 JP1_U_LDO2.1@1616,5081 1682,5015 1682,4814 1625,4757 1537,4757 1518,4738 1518,4647 ; C3_U_LDO2.1@1731,4495 1731,4534 1618,4647 1518,4647 ; R2_U_LDO2.0@1732,4407 1732,4494 1762.32,4524.32 LDO1_U_LDO2.6@1762.32,4665.53
NetC3_U_LDO3_0: C3_U_LDO3.0 LDO1_U_LDO3.7 Pot1_U_LDO3.3 R2_U_LDO3.1 | length 790.7
  Top Layer w8: LDO1_U_LDO3.7@4843.91,5640.53 4843.91,5493.09 C3_U_LDO3.0@4867,5470 ; R2_U_LDO3.1@4868,5382 4868,5469 C3_U_LDO3.0@4867,5470 ; v2(4957,5446) 4933,5470 C3_U_LDO3.0@4867,5470
  Bottom Layer w8: Pot1_U_LDO3.3@4631.5,5679.5 4671.5,5679.5 4905,5446 v2(4957,5446)
NetC3_U_LDO3_1: C3_U_LDO3.1 C4_U_LDO3.1 JP1_U_LDO3.1 LDO1_U_LDO3.6 R2_U_LDO3.0 | length 1289.9
  Top Layer w8: C4_U_LDO3.1@4449,5622 4574,5622 ; JP1_U_LDO3.1@4662,6046 JP1_U_LDO3.1@4672,6056 4738,5990 4738,5789 4681,5732 4593,5732 4574,5713 4574,5622 ; C3_U_LDO3.1@4787,5470 4787,5509 4674,5622 4574,5622 ; R2_U_LDO3.0@4788,5382 4788,5469 4818.32,5499.32 LDO1_U_LDO3.6@4818.32,5640.53
NetC3_U_LDO4_0: C3_U_LDO4.0 LDO1_U_LDO4.7 Pot1_U_LDO4.3 R2_U_LDO4.1 | length 790.7
  Top Layer w8: LDO1_U_LDO4.7@869.91,3733.53 869.91,3586.09 C3_U_LDO4.0@893,3563 ; R2_U_LDO4.1@894,3475 894,3562 C3_U_LDO4.0@893,3563 ; v2(983,3539) 959,3563 C3_U_LDO4.0@893,3563
  Bottom Layer w8: Pot1_U_LDO4.3@657.5,3772.5 697.5,3772.5 931,3539 v2(983,3539)
NetC3_U_LDO4_1: C3_U_LDO4.1 C4_U_LDO4.1 JP1_U_LDO4.1 LDO1_U_LDO4.6 R2_U_LDO4.0 | length 1289.9
  Top Layer w8: C4_U_LDO4.1@475,3715 600,3715 ; JP1_U_LDO4.1@688,4139 JP1_U_LDO4.1@698,4149 764,4083 764,3882 707,3825 619,3825 600,3806 600,3715 ; C3_U_LDO4.1@813,3563 813,3602 700,3715 600,3715 ; R2_U_LDO4.0@814,3475 814,3562 844.32,3592.32 LDO1_U_LDO4.6@844.32,3733.53
NetC3_U_LDO5_0: C3_U_LDO5.0 LDO1_U_LDO5.7 Pot1_U_LDO5.3 R2_U_LDO5.1 | length 790.7
  Top Layer w8: LDO1_U_LDO5.7@5473.91,3728.53 5473.91,3581.09 C3_U_LDO5.0@5497,3558 ; R2_U_LDO5.1@5498,3470 5498,3557 C3_U_LDO5.0@5497,3558 ; v2(5587,3534) 5563,3558 C3_U_LDO5.0@5497,3558
  Bottom Layer w8: Pot1_U_LDO5.3@5261.5,3767.5 5301.5,3767.5 5535,3534 v2(5587,3534)
NetC3_U_LDO5_1: C3_U_LDO5.1 C4_U_LDO5.1 JP1_U_LDO5.1 LDO1_U_LDO5.6 R2_U_LDO5.0 | length 1289.9
  Top Layer w8: C4_U_LDO5.1@5079,3710 5204,3710 ; JP1_U_LDO5.1@5292,4134 JP1_U_LDO5.1@5302,4144 5368,4078 5368,3877 5311,3820 5223,3820 5204,3801 5204,3710 ; C3_U_LDO5.1@5417,3558 5417,3597 5304,3710 5204,3710 ; R2_U_LDO5.0@5418,3470 5418,3557 5448.32,3587.32 LDO1_U_LDO5.6@5448.32,3728.53
NetC3_U_LDO6_0: C3_U_LDO6.0 LDO1_U_LDO6.7 Pot1_U_LDO6.3 R2_U_LDO6.1 | length 790.7
  Top Layer w8: LDO1_U_LDO6.7@3818.91,6770.53 3818.91,6623.09 C3_U_LDO6.0@3842,6600 ; R2_U_LDO6.1@3843,6512 3843,6599 C3_U_LDO6.0@3842,6600 ; v2(3932,6576) 3908,6600 C3_U_LDO6.0@3842,6600
  Bottom Layer w8: Pot1_U_LDO6.3@3606.5,6809.5 3646.5,6809.5 3880,6576 v2(3932,6576)
NetC3_U_LDO6_1: C3_U_LDO6.1 C4_U_LDO6.1 JP1_U_LDO6.1 LDO1_U_LDO6.6 R2_U_LDO6.0 | length 1289.9
  Top Layer w8: C4_U_LDO6.1@3424,6752 3549,6752 ; JP1_U_LDO6.1@3637,7176 JP1_U_LDO6.1@3647,7186 3713,7120 3713,6919 3656,6862 3568,6862 3549,6843 3549,6752 ; C3_U_LDO6.1@3762,6600 3762,6639 3649,6752 3549,6752 ; R2_U_LDO6.0@3763,6512 3763,6599 3793.32,6629.32 LDO1_U_LDO6.6@3793.32,6770.53
NetC3_U_LDO7_0: C3_U_LDO7.0 LDO1_U_LDO7.7 Pot1_U_LDO7.3 R2_U_LDO7.1 | length 790.7
  Top Layer w8: LDO1_U_LDO7.7@4548.91,3735.53 4548.91,3588.09 C3_U_LDO7.0@4572,3565 ; R2_U_LDO7.1@4573,3477 4573,3564 C3_U_LDO7.0@4572,3565 ; v2(4662,3541) 4638,3565 C3_U_LDO7.0@4572,3565
  Bottom Layer w8: Pot1_U_LDO7.3@4336.5,3774.5 4376.5,3774.5 4610,3541 v2(4662,3541)
NetC3_U_LDO7_1: C3_U_LDO7.1 C4_U_LDO7.1 JP1_U_LDO7.1 LDO1_U_LDO7.6 R2_U_LDO7.0 | length 1289.9
  Top Layer w8: C4_U_LDO7.1@4154,3717 4279,3717 ; JP1_U_LDO7.1@4367,4141 JP1_U_LDO7.1@4377,4151 4443,4085 4443,3884 4386,3827 4298,3827 4279,3808 4279,3717 ; C3_U_LDO7.1@4492,3565 4492,3604 4379,3717 4279,3717 ; R2_U_LDO7.0@4493,3477 4493,3564 4523.32,3594.32 LDO1_U_LDO7.6@4523.32,3735.53
NetC3_U_LDO8_0: C3_U_LDO8.0 LDO1_U_LDO8.7 Pot1_U_LDO8.3 R2_U_LDO8.1 | length 790.7
  Top Layer w8: LDO1_U_LDO8.7@3632.91,4666.53 3632.91,4519.09 C3_U_LDO8.0@3656,4496 ; R2_U_LDO8.1@3657,4408 3657,4495 C3_U_LDO8.0@3656,4496 ; v2(3746,4472) 3722,4496 C3_U_LDO8.0@3656,4496
  Bottom Layer w8: Pot1_U_LDO8.3@3420.5,4705.5 3460.5,4705.5 3694,4472 v2(3746,4472)
NetC3_U_LDO8_1: C3_U_LDO8.1 C4_U_LDO8.1 JP1_U_LDO8.1 LDO1_U_LDO8.6 R2_U_LDO8.0 | length 1289.9
  Top Layer w8: C4_U_LDO8.1@3238,4648 3363,4648 ; JP1_U_LDO8.1@3451,5072 JP1_U_LDO8.1@3461,5082 3527,5016 3527,4815 3470,4758 3382,4758 3363,4739 3363,4648 ; C3_U_LDO8.1@3576,4496 3576,4535 3463,4648 3363,4648 ; R2_U_LDO8.0@3577,4408 3577,4495 3607.32,4525.32 LDO1_U_LDO8.6@3607.32,4666.53
NetC3_U_LDO9_0: C3_U_LDO9.0 LDO1_U_LDO9.7 Pot1_U_LDO9.3 R2_U_LDO9.1 | length 790.7
  Top Layer w8: LDO1_U_LDO9.7@4552.91,4666.53 4552.91,4519.09 C3_U_LDO9.0@4576,4496 ; R2_U_LDO9.1@4577,4408 4577,4495 C3_U_LDO9.0@4576,4496 ; v2(4666,4472) 4642,4496 C3_U_LDO9.0@4576,4496
  Bottom Layer w8: Pot1_U_LDO9.3@4340.5,4705.5 4380.5,4705.5 4614,4472 v2(4666,4472)
NetC3_U_LDO9_1: C3_U_LDO9.1 C4_U_LDO9.1 JP1_U_LDO9.1 LDO1_U_LDO9.6 R2_U_LDO9.0 | length 1289.9
  Top Layer w8: C4_U_LDO9.1@4158,4648 4283,4648 ; JP1_U_LDO9.1@4371,5072 JP1_U_LDO9.1@4381,5082 4447,5016 4447,4815 4390,4758 4302,4758 4283,4739 4283,4648 ; C3_U_LDO9.1@4496,4496 4496,4535 4383,4648 4283,4648 ; R2_U_LDO9.0@4497,4408 4497,4495 4527.32,4525.32 LDO1_U_LDO9.6@4527.32,4666.53
NetC3_U_LDO10_0: C3_U_LDO10.0 LDO1_U_LDO10.7 Pot1_U_LDO10.3 R2_U_LDO10.1 | length 790.7
  Top Layer w8: LDO1_U_LDO10.7@864.91,4666.53 864.91,4519.09 C3_U_LDO10.0@888,4496 ; R2_U_LDO10.1@889,4408 889,4495 C3_U_LDO10.0@888,4496 ; v2(978,4472) 954,4496 C3_U_LDO10.0@888,4496
  Bottom Layer w8: Pot1_U_LDO10.3@652.5,4705.5 692.5,4705.5 926,4472 v2(978,4472)
NetC3_U_LDO10_1: C3_U_LDO10.1 C4_U_LDO10.1 JP1_U_LDO10.1 LDO1_U_LDO10.6 R2_U_LDO10.0 | length 1275.7
  Top Layer w8: C4_U_LDO10.1@470,4648 595,4648 ; JP1_U_LDO10.1@693,5082 759,5016 759,4815 702,4758 614,4758 595,4739 595,4648 ; C3_U_LDO10.1@808,4496 808,4535 695,4648 595,4648 ; R2_U_LDO10.0@809,4408 809,4495 839.32,4525.32 LDO1_U_LDO10.6@839.32,4666.53
NetC3_U_LDO11_0: C3_U_LDO11.0 LDO1_U_LDO11.7 Pot1_U_LDO11.3 R2_U_LDO11.1 | length 790.7
  Top Layer w8: LDO1_U_LDO11.7@2712.91,4666.53 2712.91,4519.09 C3_U_LDO11.0@2736,4496 ; R2_U_LDO11.1@2737,4408 2737,4495 C3_U_LDO11.0@2736,4496 ; v2(2826,4472) 2802,4496 C3_U_LDO11.0@2736,4496
  Bottom Layer w8: Pot1_U_LDO11.3@2500.5,4705.5 2540.5,4705.5 2774,4472 v2(2826,4472)
NetC3_U_LDO11_1: C3_U_LDO11.1 C4_U_LDO11.1 JP1_U_LDO11.1 LDO1_U_LDO11.6 R2_U_LDO11.0 | length 1289.9
  Top Layer w8: C4_U_LDO11.1@2318,4648 2443,4648 ; JP1_U_LDO11.1@2531,5072 JP1_U_LDO11.1@2541,5082 2607,5016 2607,4815 2550,4758 2462,4758 2443,4739 2443,4648 ; C3_U_LDO11.1@2656,4496 2656,4535 2543,4648 2443,4648 ; R2_U_LDO11.0@2657,4408 2657,4495 2687.32,4525.32 LDO1_U_LDO11.6@2687.32,4666.53
NetC3_U_LDO12_0: C3_U_LDO12.0 LDO1_U_LDO12.7 Pot1_U_LDO12.3 R2_U_LDO12.1 | length 790.7
  Top Layer w8: LDO1_U_LDO12.7@3821.41,5836.03 3821.41,5688.59 C3_U_LDO12.0@3844.5,5665.5 ; R2_U_LDO12.1@3845.5,5577.5 3845.5,5664.5 C3_U_LDO12.0@3844.5,5665.5 ; v2(3934.5,5641.5) 3910.5,5665.5 C3_U_LDO12.0@3844.5,5665.5
  Bottom Layer w8: Pot1_U_LDO12.3@3609,5875 3649,5875 3882.5,5641.5 v2(3934.5,5641.5)
NetC3_U_LDO12_1: C3_U_LDO12.1 C4_U_LDO12.1 JP1_U_LDO12.1 LDO1_U_LDO12.6 R2_U_LDO12.0 | length 1289.9
  Top Layer w8: C4_U_LDO12.1@3426.5,5817.5 3551.5,5817.5 ; JP1_U_LDO12.1@3639.5,6241.5 JP1_U_LDO12.1@3649.5,6251.5 3715.5,6185.5 3715.5,5984.5 3658.5,5927.5 3570.5,5927.5 3551.5,5908.5 3551.5,5817.5 ; C3_U_LDO12.1@3764.5,5665.5 3764.5,5704.5 3651.5,5817.5 3551.5,5817.5 ; R2_U_LDO12.0@3765.5,5577.5 3765.5,5664.5 3795.82,5694.82 LDO1_U_LDO12.6@3795.82,5836.03
NetC3_U_LDO13_0: C3_U_LDO13.0 LDO1_U_LDO13.7 Pot1_U_LDO13.3 R2_U_LDO13.1 | length 790.7
  Top Layer w8: LDO1_U_LDO13.7@3631.91,3730.53 3631.91,3583.09 C3_U_LDO13.0@3655,3560 ; R2_U_LDO13.1@3656,3472 3656,3559 C3_U_LDO13.0@3655,3560 ; v2(3745,3536) 3721,3560 C3_U_LDO13.0@3655,3560
  Bottom Layer w8: Pot1_U_LDO13.3@3419.5,3769.5 3459.5,3769.5 3693,3536 v2(3745,3536)
NetC3_U_LDO13_1: C3_U_LDO13.1 C4_U_LDO13.1 JP1_U_LDO13.1 LDO1_U_LDO13.6 R2_U_LDO13.0 | length 1289.9
  Top Layer w8: C4_U_LDO13.1@3237,3712 3362,3712 ; JP1_U_LDO13.1@3450,4136 JP1_U_LDO13.1@3460,4146 3526,4080 3526,3879 3469,3822 3381,3822 3362,3803 3362,3712 ; C3_U_LDO13.1@3575,3560 3575,3599 3462,3712 3362,3712 ; R2_U_LDO13.0@3576,3472 3576,3559 3606.32,3589.32 LDO1_U_LDO13.6@3606.32,3730.53
NetC7_1: C7.1 SMA2.5 | length 465.8
  Top Layer w8: SMA2.5@343,6049 cw(c350.24,6041.76) 350.24,6052 C7.1@808,6052
NetC9_1: C9.1 SMA3.5 | length 347.3
  Top Layer w8: SMA3.5@346,6664 cw(c358.07,6651.93) 358.07,6669 C9.1@692,6669
NetC10_1: C10.1 SMA4.5 | length 243.1
  Top Layer w8: SMA4.5@1529,7177 1529,6948 C10.1@1539,6938
NetJP1_U_LDO1_2: JP1_U_LDO1.2 JP2_U_LDO1.2 R1_U_LDO1.0 | length 341.5
  Top Layer w8: JP2_U_LDO1.2@4969,4954 4984,4939 R1_U_LDO1.0@5082,4939 5136,4939 5197,5000 JP1_U_LDO1.2@5197,5082
NetJP1_U_LDO2_2: JP1_U_LDO2.2 JP2_U_LDO2.2 R1_U_LDO2.0 | length 341.5
  Top Layer w8: JP2_U_LDO2.2@1288,4953 1303,4938 R1_U_LDO2.0@1401,4938 1455,4938 1516,4999 JP1_U_LDO2.2@1516,5081
NetJP1_U_LDO3_2: JP1_U_LDO3.2 JP2_U_LDO3.2 R1_U_LDO3.0 | length 341.5
  Top Layer w8: JP2_U_LDO3.2@4344,5928 4359,5913 R1_U_LDO3.0@4457,5913 4511,5913 4572,5974 JP1_U_LDO3.2@4572,6056
NetJP1_U_LDO4_2: JP1_U_LDO4.2 JP2_U_LDO4.2 R1_U_LDO4.0 | length 341.5
  Top Layer w8: JP2_U_LDO4.2@370,4021 385,4006 R1_U_LDO4.0@483,4006 537,4006 598,4067 JP1_U_LDO4.2@598,4149
NetJP1_U_LDO5_2: JP1_U_LDO5.2 JP2_U_LDO5.2 R1_U_LDO5.0 | length 341.5
  Top Layer w8: JP2_U_LDO5.2@4974,4016 4989,4001 R1_U_LDO5.0@5087,4001 5141,4001 5202,4062 JP1_U_LDO5.2@5202,4144
NetJP1_U_LDO6_2: JP1_U_LDO6.2 JP2_U_LDO6.2 R1_U_LDO6.0 | length 341.5
  Top Layer w8: JP2_U_LDO6.2@3319,7058 3334,7043 R1_U_LDO6.0@3432,7043 3486,7043 3547,7104 JP1_U_LDO6.2@3547,7186
NetJP1_U_LDO7_2: JP1_U_LDO7.2 JP2_U_LDO7.2 R1_U_LDO7.0 | length 341.5
  Top Layer w8: JP2_U_LDO7.2@4049,4023 4064,4008 R1_U_LDO7.0@4162,4008 4216,4008 4277,4069 JP1_U_LDO7.2@4277,4151
NetJP1_U_LDO8_2: JP1_U_LDO8.2 JP2_U_LDO8.2 R1_U_LDO8.0 | length 341.5
  Top Layer w8: JP2_U_LDO8.2@3133,4954 3148,4939 R1_U_LDO8.0@3246,4939 3300,4939 3361,5000 JP1_U_LDO8.2@3361,5082
NetJP1_U_LDO9_2: JP1_U_LDO9.2 JP2_U_LDO9.2 R1_U_LDO9.0 | length 341.5
  Top Layer w8: JP2_U_LDO9.2@4053,4954 4068,4939 R1_U_LDO9.0@4166,4939 4220,4939 4281,5000 JP1_U_LDO9.2@4281,5082
NetJP1_U_LDO10_2: JP1_U_LDO10.2 JP2_U_LDO10.2 R1_U_LDO10.0 | length 341.5
  Top Layer w8: JP2_U_LDO10.2@365,4954 380,4939 R1_U_LDO10.0@478,4939 532,4939 593,5000 JP1_U_LDO10.2@593,5082
NetJP1_U_LDO11_2: JP1_U_LDO11.2 JP2_U_LDO11.2 R1_U_LDO11.0 | length 341.5
  Top Layer w8: JP2_U_LDO11.2@2213,4954 2228,4939 R1_U_LDO11.0@2326,4939 2380,4939 2441,5000 JP1_U_LDO11.2@2441,5082
NetJP1_U_LDO12_2: JP1_U_LDO12.2 JP2_U_LDO12.2 R1_U_LDO12.0 | length 341.5
  Top Layer w8: JP2_U_LDO12.2@3321.5,6123.5 3336.5,6108.5 R1_U_LDO12.0@3434.5,6108.5 3488.5,6108.5 3549.5,6169.5 JP1_U_LDO12.2@3549.5,6251.5
NetJP1_U_LDO13_2: JP1_U_LDO13.2 JP2_U_LDO13.2 R1_U_LDO13.0 | length 341.5
  Top Layer w8: JP2_U_LDO13.2@3132,4018 3147,4003 R1_U_LDO13.0@3245,4003 3299,4003 3360,4064 JP1_U_LDO13.2@3360,4146
NetJP5_1: JP5.1 Pot2.2 | length 369.2
  Top Layer w8: JP5.1@1617,3779 1842,3779 Pot2.2@1944,3677
NetJP6_1: JP6.1 Pot3.2 | length 365.2
  Top Layer w8: Pot3.2@2220,3677 2332,3677 2429,3774 JP6.1@2545,3774
NetJP7_1: JP7.1 Pot4.2 | length 274.2
  Top Layer w15: JP7.1@5423,6243 5473,6243 5587,6129 Pot4.2@5650,6129
NetJP8_1: JP8.1 Pot5.2 | length 263.4
  Top Layer w15: JP8.1@6335,6240 6464,6111 Pot5.2@6545,6111
NetJP9_1: JP9.1 Pot6.2 | length 244.3
  Top Layer w15: JP9.1@5909,6251 5968,6251 Pot6.2@6099,6120
NetPot2_1: Pot2.1 R9.0 | length 190.1
  Top Layer w8: Pot2.1@1944,3777 2007,3840 R9.0@2007,3941
NetPot3_1: Pot3.1 R10.0 | length 177.9
  Top Layer w8: R10.0@2184,3940 2184,3813 Pot3.1@2220,3777
NetPot4_1: Pot4.1 R11.0 | length 258.7
  Top Layer w15: Pot4.1@5650,6029 5758,5921 R11.0@5758,5815
NetPot4_3: Pot4.3 R14.1 | length 309.1
  Top Layer w15: Pot4.3@5650,6229 5650,6432 R14.1@5725,6507
NetPot5_1: Pot5.1 R12.0 | length 229.7
  Top Layer w15: Pot5.1@6545,6011 6545,5982 6583,5944 R12.0@6583,5797